# Altium PCB Miguel Board.PcbDoc
Units mil, origin at the board's own origin, x right, y up, seen from the top; angles counter-clockwise.
Board outline 6000 x 4000 mil, 2 copper layers (Top Layer, Bottom Layer); 71 components, 45 nets, 212 pads, 0 vias.
Unrouted connection lines stored in the file: 145.
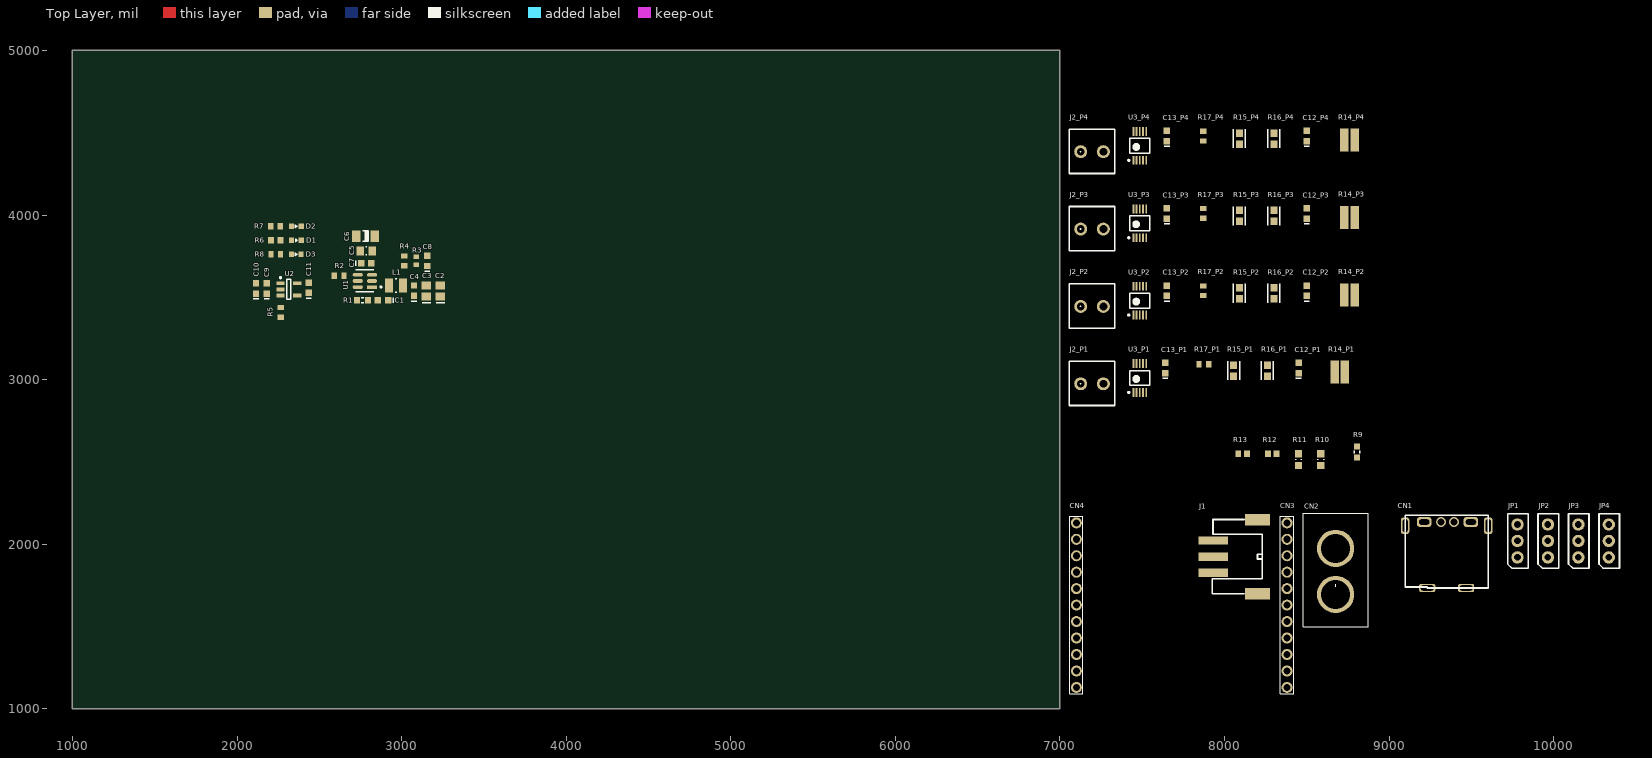
[diagram p0: Top Layer view]
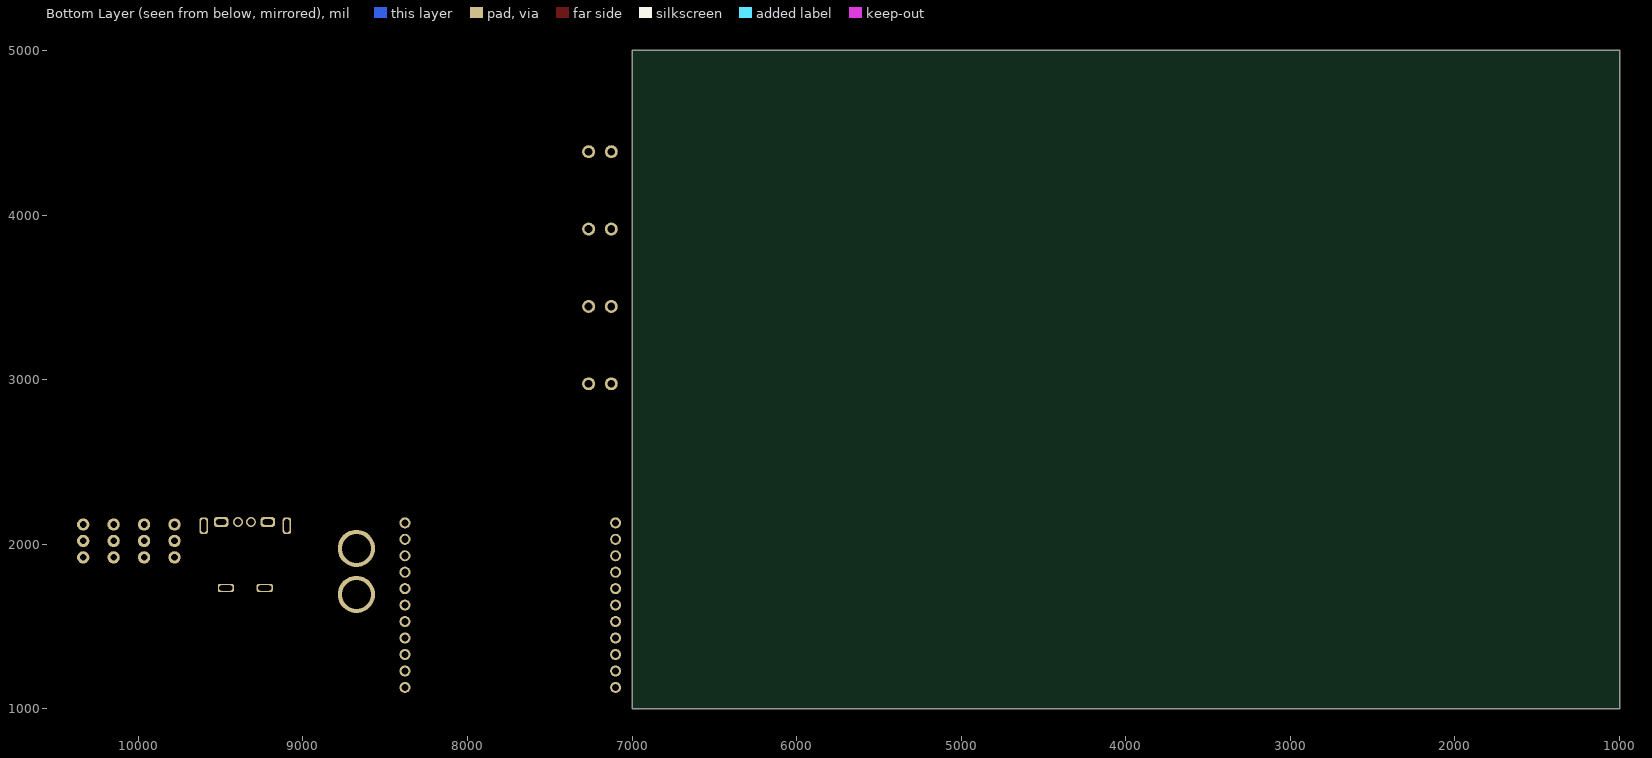
[diagram p1: Bottom Layer view, seen from below]

## Layer stack, top to bottom
Top Solder: solder mask 0.4, Solder Resist, Dk 3.5
Top Layer: signal copper 1.4
Dielectric 1: dielectric 12.6, FR-4, Dk 4.8
Bottom Layer: signal copper 1.4
Bottom Solder: solder mask 0.4, Solder Resist, Dk 3.5

## Board outline
1000,1000 7000,1000 7000,5000 1000,5000

## Design rules (kind name [scope] priority, off if disabled: settings)
Clearance [All] p1: gap=10 ignorepadtopadclearanceinfootprint=FALSE except(0: Arc-Hole Track-Hole SMDPad-Hole THPad-Hole Via-Hole Fill-Hole Poly-Hole Region-Hole Text-Hole)
PolygonConnect [All] p1: connectstyle=Relief reliefconductorwidth=10 reliefentries=4 polygonreliefangle="90 Angle" airgapwidth=10
RoomDefinition Power [InComponentClass('Power')] p1: confinementstyle=ConfineIn formatcopy=TRUE lockcomponents=FALSE outline 2060,3293.07 3345,3293.07 3345,4008.07 2060,4008.07
RoomDefinition P4 [InComponentClass('P4')] p2: confinementstyle=ConfineIn formatcopy=TRUE lockcomponents=FALSE outline 7045,4210 8855,4210 8855,4625 7045,4625
RoomDefinition P3 [InComponentClass('P3')] p3: confinementstyle=ConfineIn formatcopy=TRUE lockcomponents=FALSE outline 7045,3740 8855,3740 8855,4155 7045,4155
RoomDefinition P2 [InComponentClass('P2')] p4: confinementstyle=ConfineIn formatcopy=TRUE lockcomponents=FALSE outline 7045,3270 8855,3270 8855,3685 7045,3685
RoomDefinition P1 [InComponentClass('P1')] p5: confinementstyle=ConfineIn formatcopy=TRUE lockcomponents=FALSE outline 7045,2800 8785,2800 8785,3215 7045,3215
RoomDefinition External [InComponentClass('External')] p6: confinementstyle=ConfineIn formatcopy=TRUE lockcomponents=FALSE outline 7045,1065 10815,1065 10815,2745 7045,2745
RoutingVias [All] p1: holewidth=28 width=50 viastyle="Through Hole" minholewidth=28 minwidth=50 maxholewidth=28 maxwidth=50
SolderMaskExpansion [All] p1: expansion=4 istentingtop=FALSE
Width [All] p1: maxlimit=10 minlimit=10 preferedwidth=10
30 further rules are at their usual default settings.

## Classes and differential pairs
channel class "Current Sensors": P1 P2 P3 P4
net class Motor_Reset[1..4]: Motor_Reset1 Motor_Reset2 Motor_Reset3 Motor_Reset4
net class Motor_Alert[1..4]: Motor_Alert1 Motor_Alert2 Motor_Alert3 Motor_Alert4
net class Motor_ADC[1..4]: Motor_ADC1 Motor_ADC2 Motor_ADC3 Motor_ADC4
component class Power: C1 C2 C3 C4 C5 C6 C7 C8 C9 C10 C11 D1 D2 D3 L1 R1 R2 R3 R4 R5 R6 R7 R8 U1 U2
component class P4: C12_P4 C13_P4 J2_P4 R14_P4 R15_P4 R16_P4 R17_P4 U3_P4
component class P3: C12_P3 C13_P3 J2_P3 R14_P3 R15_P3 R16_P3 R17_P3 U3_P3
component class P2: C12_P2 C13_P2 J2_P2 R14_P2 R15_P2 R16_P2 R17_P2 U3_P2
component class P1: C12_P1 C13_P1 J2_P1 R14_P1 R15_P1 R16_P1 R17_P1 U3_P1
component class External: CN1 CN2 CN3 CN4 J1 JP1 JP2 JP3 JP4 R9 R10 R11 R12 R13

## Components (designator, comment, footprint, x,y, rotation, side; value= is the part's Value field where it differs from the comment)
C1 "0.1uF, 50V, 10%, X7R, 0603" "CAPC1608N(0603\")" 2886.5,3482.01 r180 top
C2 "22uF 35V 0805 SMD, Ceramic" "CAPC2012N(0805\")" 3235,3538.54 r90 top value=22µF
C3 "22uF 35V 0805 SMD, Ceramic" "CAPC2012N(0805\")" 3150,3538.54 r90 top value=22µF
C4 "Placeholder_Capacitor_0603" "CAPC1608N(0603\")" 3075,3540.51 r90 top value=DNP
C5 "10uF, 25V, X5R, 0805" CAPC2013X12N 2785,3782.01 r180 top
C6 "Placeholder_Capacitor_1206" "CAPC3216N(1206\")" 2780,3872.01 r0 top value=DNP
C7 "0.1uF, 50V, 10%, X7R, 0603" "CAPC1608N(0603\")" 2785,3707.01 r0 top
C8 "Placeholder_Capacitor_0603" "CAPC1608N(0603\")" 3155,3722.01 r90 top value=DNP
C9 "1uF 25V 0603 SMD, Ceramic" "CAPC1608N(0603\")" 2180,3553.5 r90 top value=1µF
C10 "0.1uF 16V 0603 SMD, Ceramic" "CAPC1608N(0603\")" 2115,3553.5 r90 top value=0.1µF
C11 "4.7uF 10V 0603 SMD, Ceramic" "CAPC1608N(0603\")" 2435,3558.5 r90 top value=4.7µF
C12_P1 "0.1uF, 50V, 10%, X7R, 0603" "CAPC1608N(0603\")" 8450,3070 r90 top (schematic designator C12)
C12_P2 "0.1uF, 50V, 10%, X7R, 0603" "CAPC1608N(0603\")" 8500,3540 r90 top (schematic designator C12)
C12_P3 "0.1uF, 50V, 10%, X7R, 0603" "CAPC1608N(0603\")" 8500,4010 r90 top (schematic designator C12)
C12_P4 "0.1uF, 50V, 10%, X7R, 0603" "CAPC1608N(0603\")" 8500,4480 r90 top (schematic designator C12)
C13_P1 "10 nF, 50V 0603 SMD, Ceramic" "CAPC1608N(0603\")" 7640,3070 r90 top value=10nF (schematic designator C13)
C13_P2 "10 nF, 50V 0603 SMD, Ceramic" "CAPC1608N(0603\")" 7650,3540 r90 top value=10nF (schematic designator C13)
C13_P3 "10 nF, 50V 0603 SMD, Ceramic" "CAPC1608N(0603\")" 7650,4010 r90 top value=10nF (schematic designator C13)
C13_P4 "10 nF, 50V 0603 SMD, Ceramic" "CAPC1608N(0603\")" 7650,4480 r90 top value=10nF (schematic designator C13)
CN1 "USB - Type A Female" "USB - Type A Female-Footprint-1" 9355,2135 r0 top
CN2 "XT-60, Male, 1x2, Through hole" "XT-60 Male" 8675,1695 r90 top
CN3 "PH1-11-UA" PH1-11-UA-Footprint-1 8380,1130 r90 top
CN4 "PH1-11-UA" PH1-11-UA-Footprint-1 7100,1130 r90 top
D1 "LT Q39G-Q1OO-25-1" FP-LB_Q39E-MFG 2360.47,3847.01 r180 top
D2 "LT Q39G-Q1OO-25-1" FP-LB_Q39E-MFG 2360,3932.01 r180 top
D3 "LT Q39G-Q1OO-25-1" FP-LB_Q39E-MFG 2359.53,3762.01 r180 top
J1 "S3B-XH-SM4-TB(LF)(SN)" "New footprint 1" 8200,1700 r90 top
J2_P1 "2x1 Terminal Block 3.5mm" "2x1 Terminal Block 3.5mm-Footprint-1" 7195,2975 r0 top (schematic designator J2)
J2_P2 "2x1 Terminal Block 3.5mm" "2x1 Terminal Block 3.5mm-Footprint-1" 7195,3445 r0 top (schematic designator J2)
J2_P3 "2x1 Terminal Block 3.5mm" "2x1 Terminal Block 3.5mm-Footprint-1" 7195,3915 r0 top (schematic designator J2)
J2_P4 "2x1 Terminal Block 3.5mm" "2x1 Terminal Block 3.5mm-Footprint-1" 7195,4385 r0 top (schematic designator J2)
JP1 "1x3 Male Jumper" "Header, Male, 1x3, Pitch: 0.1\" (2.54mm),THT" 9780,2020 r90 top
JP2 "1x3 Male Jumper" "Header, Male, 1x3, Pitch: 0.1\" (2.54mm),THT" 9965,2020 r90 top
JP3 "1x3 Male Jumper" "Header, Male, 1x3, Pitch: 0.1\" (2.54mm),THT" 10150,2020 r90 top
JP4 "1x3 Male Jumper" "Header, Male, 1x3, Pitch: 0.1\" (2.54mm),THT" 10335,2020 r90 top
L1 "DFE252012P-1R5M=P2" INDC2520X12N 2965,3572.01 r0 top
R1 "0R, 1%, 1/10W, 0603 SMD" "RESC1608N(0603\")" 2761.54,3482.01 r0 top value=0R
R2 "RC0603FR-0710KL" RESC1608X55X25ML10T15 2620.47,3632.01 r180 top
R3 "ERJ-3EKF7322V" RESC1608X55X30LL15T15 3090,3722.01 r270 top
R4 "RC0603FR-0710KL" RESC1608X55X25ML10T15 3015,3722.01 r270 top
R5 "RC0603FR-0710KL" RESC1608X55X25ML10T15 2265,3408.5 r90 top
R6 "ERJ3EKF1001V" RESC1608X55X30ML15T15 2235,3847.01 r0 top
R7 "536R" RESC1608X55X30ML15T15 2233.54,3932.01 r0 top
R8 "110R" RESC1608X55X25ML10T15 2235,3762.01 r0 top
R9 "0R, 1%, 1/10W, 0603 SMD" "RESC1608N(0603\")" 8805,2560 r90 top value=0R
R10 "RC0603FR-07160KL" RESC0603(1608)_M 8585,2514.57 r90 top
R11 "RMCF0603FT330K" RESC0603(1608)_M 8450,2514.57 r90 top
R12 "CRCW0603-100KFKEA" RESC1609X50X30ML10T20 8290,2549.57 r0 top
R13 "CRCW0603-100KFKEA" RESC1609X50X30ML10T20 8110,2549.57 r0 top
R14_P1 "3mR, 1%, 1W, 1206" RESC1632X07M 8700,3045 r0 top (schematic designator R14)
R14_P2 "3mR, 1%, 1W, 1206" RESC1632X07M 8760,3515 r0 top (schematic designator R14)
R14_P3 "3mR, 1%, 1W, 1206" RESC1632X07M 8760,3985 r0 top (schematic designator R14)
R14_P4 "3mR, 1%, 1W, 1206" RESC1632X07M 8760,4455 r0 top (schematic designator R14)
R15_P1 "ERJ3EKF10R0V" FP-ERJ3EK-IPC_A 8055,3055 r90 top (schematic designator R15)
R15_P2 "ERJ3EKF10R0V" FP-ERJ3EK-IPC_A 8090,3525 r90 top (schematic designator R15)
R15_P3 "ERJ3EKF10R0V" FP-ERJ3EK-IPC_A 8090,3995 r90 top (schematic designator R15)
R15_P4 "ERJ3EKF10R0V" FP-ERJ3EK-IPC_A 8090,4465 r90 top (schematic designator R15)
R16_P1 "ERJ3EKF10R0V" FP-ERJ3EK-IPC_A 8260,3055 r90 top (schematic designator R16)
R16_P2 "ERJ3EKF10R0V" FP-ERJ3EK-IPC_A 8300,3525 r90 top (schematic designator R16)
R16_P3 "ERJ3EKF10R0V" FP-ERJ3EK-IPC_A 8300,3995 r90 top (schematic designator R16)
R16_P4 "ERJ3EKF10R0V" FP-ERJ3EK-IPC_A 8300,4465 r90 top (schematic designator R16)
R17_P1 "RC0603FR-0710KL" RESC1608X55X25ML10T15 7875,3095 r0 top (schematic designator R17)
R17_P2 "RC0603FR-0710KL" RESC1608X55X25ML10T15 7870,3540 r90 top (schematic designator R17)
R17_P3 "RC0603FR-0710KL" RESC1608X55X25ML10T15 7870,4010 r90 top (schematic designator R17)
R17_P4 "RC0603FR-0710KL" RESC1608X55X25ML10T15 7870,4480 r90 top (schematic designator R17)
U1 "TPS563249DDCR" FP-DDC0005A-IPC_B 2776.68,3599.61 r180 top
U2 "LP2981-33DBVR" SOT95P280X145-5N 2315,3548.5 r0 top
U3_P1 "INA381A3IDGSR" TSSOP50P490X110-10N 7485,3010 r90 top (schematic designator U3)
U3_P2 "INA381A3IDGSR" TSSOP50P490X110-10N 7485,3480 r90 top (schematic designator U3)
U3_P3 "INA381A3IDGSR" TSSOP50P490X110-10N 7485,3950 r90 top (schematic designator U3)
U3_P4 "INA381A3IDGSR" TSSOP50P490X110-10N 7485,4420 r90 top (schematic designator U3)

## Footprints (in the part's own frame and the unit in brackets; to place one, negate y for a bottom-side part, rotate by r counter-clockwise, add the part's x,y. Pads: shape width x height; smd on the part's side, far side on the other; paste and mask are expansions set on the pad)
"2x1 Terminal Block 3.5mm-Footprint-1" [mm]
  round 2 hole 1.2: 1(-1.75,0) 2(1.75,0)
  silkscreen extent -3.5,-3.37 3.5,3.49, body extent -3.57,-4.32 4.08,4.08, height 13.05
"CAPC1608N(0603\")" [mm] "Chip Capacitor, Body 1.6x0.8mm (0603\"), IPC Medium Density"
  rect 1x1 smd: 1(-0.8,0) 2(0.8,0)
  silkscreen extent -1.6,-0.4 -1.6,0.4, body extent -0.8,-0.4 0.8,0.4, height 0.9
"CAPC2012N(0805\")" [mm] "Chip Capacitor, Body 2.0x1.3mm (0805\"), IPC Medium Density"
  rect 1.3x1.5 smd: 1(-0.85,0) 2(0.85,0)
  silkscreen extent -1.8,-0.65 -1.8,0.65, body extent -1,-0.62 1,0.63, height 1
CAPC2013X12N [mm] "Chip Capacitor, 2-Leads, Body 2.05x1.30mm, IPC Medium Density"
  rect 1.1x1.45 smd: 1(-0.925,0) 2(0.925,0)
  silkscreen extent -0.1,-0.63 0.1,0.63, body extent -1.07,-0.7 1.07,0.7, height 1.25
"CAPC3216N(1206\")" [mm] "Chip Capacitor, Body 3.2x1.6mm (1206\"), IPC Medium Density"
  rect 1.3x1.8 smd: 1(-1.45,0) 2(1.45,0)
  silkscreen extent -0.4,-0.8 0.4,0.8, body extent -1.6,-0.8 1.6,0.8, height 1
FP-DDC0005A-IPC_B [mm]
  rect 1.554x0.572 smd paste+0 mask+0: 1(-1.1,0.95)
  rrect100% 1.554x0.572 smd paste+0 mask+0: 2(-1.1,0) 3(-1.1,-0.95) 4(1.1,-0.95) 5(1.1,0) 6(1.1,0.95)
  silkscreen extent -2.6,-1.7 1.4,1.7, body extent -2.13,-1.7 2.13,1.7, height 0.25
FP-ERJ3EK-IPC_A [mil]
  rect 45.53x41.82 smd paste+0 mask+0: 1(-33.5,0) 2(33.5,0)
  silkscreen extent -56,-37 56,37, body extent -76,-41 76,41, height 10
FP-LB_Q39E-MFG [mm]
  rect 0.8x0.8 smd paste+0 mask+0: 1(-0.75,0) 2(0.75,0)
  silkscreen extent -0.13,-0.25 0.13,0.25, body extent -1.25,-0.55 1.25,0.55, height 0.25
"Header, Male, 1x3, Pitch: 0.1\" (2.54mm),THT" [mm]
  round 1.9 hole 1.016: 1(-2.54,0) 2(0,0) 3(2.54,0)
  silkscreen extent -4.19,-1.65 4.19,1.52, body extent -3.81,-1.27 3.81,1.27, height 9.5
INDC2520X12N [mm] "Chip Inductor, 2-Leads, Body 2.50x2.00mm, IPC Medium Density"
  rect 1.23x2.22 smd: 1(-1.085,0) 2(1.085,0)
  silkscreen extent -0.1,-1.01 0.1,1.01, body extent -1.35,-1.1 1.35,1.1, height 1.2
"New footprint 1" [mm]
  rect 1.3x4.5 smd: 1(3.2,6.817) 2(5.7,6.817) 3(8.199,6.817)
  rect 1.8x3.9 smd: 4(0,0) 5(11.4,0)
  silkscreen extent 0,-0.76 11.43,6.98, body extent -0.51,-1.7 11.94,8.3, height 6
PH1-11-UA-Footprint-1 [mil]
  round 67 hole 43.35: 1(0,0) 2(100,0) 3(200,0) 4(300,0) 5(400,0) 6(500,0) 7(600,0) 8(700,0) 9(800,0) 10(900,0) 11(1000,0)
  silkscreen extent -40,-40 1040,40, body extent -60,-49 1060,49, height 197
RESC0603(1608)_M [mm] "Chip Resistor, Body 1.6x0.8mm, IPC Low Density"
  rect 1.1x1.1 smd: 1(-0.9,0) 2(0.9,0)
  silkscreen extent -0.05,-0.45 0.05,0.45, body extent -0.85,-0.47 0.85,0.47, height 0.6
"RESC1608N(0603\")" [mm] "Chip Resistor, Body 1.6x0.8mm (0603\"), IPC Medium Density"
  rect 0.9x1 smd: 1(-0.85,0) 2(0.85,0)
  silkscreen extent -0.2,-0.4 0.2,0.4, body extent -0.77,-0.42 0.78,0.43, height 0.44
RESC1608X55X25ML10T15 [mm] "Chip Resistor, 2-Leads, Body 1.60x0.80mm, IPC Low Density"
  rect 0.8x1 smd: 1(-0.75,0) 2(0.75,0)
  body extent -0.85,-0.45 0.85,0.45, height 0.55
RESC1608X55X30LL15T15 [mm] "Chip Resistor, 2-Leads, Body 1.60x0.80mm, IPC High Density"
  rect 0.7x0.85 smd: 1(-0.625,0) 2(0.625,0)
  body extent -0.87,-0.48 0.87,0.48, height 0.55
RESC1608X55X30ML15T15 [mm] "Chip Resistor, 2-Leads, Body 1.60x0.80mm, IPC Low Density"
  rect 0.9x1.05 smd: 1(-0.725,0) 2(0.725,0)
  body extent -0.87,-0.48 0.87,0.48, height 0.55
RESC1609X50X30ML10T20 [mm] "Chip Resistor, 2-Leads, Body 1.55x0.85mm, IPC Low Density"
  rect 0.9x1.05 smd: 1(-0.675,0) 2(0.675,0)
  body extent -0.82,-0.48 0.82,0.48, height 0.5
RESC1632X07M [mm] "Chip Resistor, 2-Leads, Body 1.60x3.20mm, IPC Low Density"
  rect 1.3x3.55 smd: 1(-0.8,0) 2(0.8,0)
  body extent -0.9,-1.73 0.9,1.73, height 0.7
SOT95P280X145-5N [mm] "SOT23, 5-Leads, Body 2.90x2.80mm, Pitch 0.95mm, IPC Medium Density"
  rect 1.3x0.6 smd: 1(-1.3,0.95) 2(-1.3,0) 3(-1.3,-0.95) 4(1.3,-0.95) 5(1.3,0.95)
  silkscreen extent -1.42,-1.55 0.3,1.92, body extent -1.5,-1.53 1.5,1.53, height 1.45
TSSOP50P490X110-10N [mm] "TSSOP, 10-Leads, Body 3.00x3.00mm, Pitch 0.50mm, IPC Medium Density"
  rect 1.35x0.3 smd: 1(-2.225,1) 2(-2.225,0.5) 3(-2.225,0) 4(-2.225,-0.5) 5(-2.225,-1) 6(2.225,-1) 7(2.225,-0.5) 8(2.225,0) 9(2.225,0.5) 10(2.225,1)
  silkscreen extent -2.35,-1.55 1.15,1.82, body extent -2.45,-1.55 2.45,1.55, height 1.1
"USB - Type A Female-Footprint-1" [mil]
  rrect50% 86.6x59.06 hole 31.5 slot 63 at 0 deg: 1(-141.74,0) 4(141.74,0)
  round 60 hole 43.31: 2(-39.38,0) 3(39.38,0)
  rrect50% 51.18x98.43 hole 31.5 slot 78.74 at 90 deg: 5(247.76,-22.84) 8(-257.75,-22.84)
  rrect50% 98.43x51.18 hole 31.5 slot 78.74 at 0 deg: 6(113.11,-400.79) 7(-123.1,-400.79)
  silkscreen extent -258,-401 248,40, body extent -310,-512 310,57, height 290
"XT-60 Male" [mm]
  round 5.75 hole 4.5: 1(0,0) 2(7.1,0)
  silkscreen extent -5,-5 12.5,5, body extent -4.2,-4 11.7,4.15, height 16.5

## Part data
C1 C7 C12_P1 C12_P2 C12_P3 C12_P4: library part CMP-006-0007-1, "0.1µF ±10% Ceramic Capacitor X7R 0603 (1608 Metric)", Capacitance=0.1µF, Operating Temperature="-55°C ~ 125°C", Package / Case="0603 (1608 Metric)", Component Type=Standard, ComponentLink1Description=Digi-Key, ComponentLink1URL=https://www.digikey.ca/product-detail/en/tdk-corporation/C1608X7R1H104M080AA/445-5098-1-ND/2093713, Created By="Poorna Chander Kalidas", Design Item ID="0.1uF, 50V, 10%, X7R, 0603", Mounting Type="Surface Mount, MLCC", Pin Count=2, Source=AUVic_Schematic_Library_Capacitors.SchLib
C2 C3: library part CMP-006-0036-1, "Capacitor, Ceramic, 35V, +/- 20%, 0805 SMD, X5R", Component Type=Standard, Design Item ID="22uF 35V 0805 SMD, Ceramic", PackageDescription="Chip Capacitor", Pin Count=2, Published=14-06-01, Publisher=AUVic, Source=AUVic_Schematic_Library_Capacitors.SchLib
C4 C8: library part CMP-006-0054-1, "Placeholder 0603 SMT Footprint", Component Type="Standard (No BOM)", Date Created=2016-06-26, Design Item ID=Placeholder_Capacitor_0603, Made By="Ashwin Sira", PackageDescription="Chip Capacitor", Pin Count=2, Publisher=AUVic, Source=AUVic_Schematic_Library_Capacitors.SchLib
C5: library part CMP-00114-1, "0805 10 uF 25 V ±10% Tolerance X5R SMT Multilayer Ceramic Capacitor", Capacitance=10uF, Case Code (Imperial)=0805, Case Code (Metric)=2012, Dielectric=X7R, Max Operating Temperature=85°C, Min Operating Temperature=-55°C, Package Quantity=1, Resistor Type=Ceramic, Tolerance=10%, Voltage Rating=25V, Case/Package=0805, Height=1.25mm, Lead Free="Lead Free", Length=0.079inch, Mount="Surface Mount", Number of Pins=2, Packaging="Tape and Reel", REACH SVHC="No SVHC", Termination=SMD/SMT, Thickness=0.053inch, Voltage Rating (DC)=25V, Width=0.049inch
C6: library part CMP-006-0056-1, "Placeholder 1206 SMT Footprint", Component Type="Standard (No BOM)", Date Created=2016-06-26, Design Item ID=Placeholder_Capacitor_1206, Made By="Ashwin Sira", PackageDescription="Chip Capacitor", Pin Count=2, Publisher=AUVic, Source=AUVic_Schematic_Library_Capacitors.SchLib
C9: library part CMP-006-0027-1, "Capacitor, Ceramic, 25V, +/- 10%, 0603 SMD, X5R", Component Type=Standard, Created By="Andy Bates", Design Item ID="1uF 25V 0603 SMD, Ceramic", MFG=Murata-Electronics-North-America, MFG#=GRM188R61E105KA12D, PackageDescription="Chip Capacitor", Pin Count=2, Published=16-06-27, Publisher=AUVic, Source=AUVic_Schematic_Library_Capacitors.SchLib
C10: library part CMP-006-0005-1, "Capacitor, Ceramic, 16V, +/- 10%, 0603 SMD, X7R", Component Type=Standard, Created By="Andy Bates", Design Item ID="0.1uF 16V 0603 SMD, Ceramic", PackageDescription="Chip Capacitor", Pin Count=2, Published=16-04-26, Publisher=AUVic, Source=AUVic_Schematic_Library_Capacitors.SchLib
C11: library part CMP-006-0043-1, "Capacitor, Ceramic, 10V, +/- 10%, 0603 SMD, X5R", Component Type=Standard, Created By="Ashwin Sira", Design Item ID="4.7uF 10V 0603 SMD, Ceramic", MFG=Samsung, MFG#=GRM188R61A475KE15D, PackageDescription="Chip Capacitor", Pin Count=2, Published=16-06-23, Publisher=AUVic, Source=AUVic_Schematic_Library_Capacitors.SchLib
C13_P1 C13_P2 C13_P3 C13_P4: library part CMP-006-0010-1, "Capacitor, Ceramic, 50V, +/- 10%, 0603 SMD", Component Type=Standard, Created By=Gabriel, Design Item ID="10 nF, 50V 0603 SMD, Ceramic", MFG=Samsung, MFG#=GRM188R61A475KE15D, PackageDescription="Chip Capacitor", Pin Count=2, Published=16-06-23, Publisher=AUVic, Source=AUVic_Schematic_Library_Capacitors.SchLib
CN1: library part CMP-00116-2, "USB - Type A Female USB 2.0 THT", LCSC Part #=C168725, Created By="Miguel Manguerra"
CN2: library part CMP-005-0041-1, Component Type="Standard (No BOM)", Date Published=2016-09-08, Design Item ID="XT-60, Male, 1x2, Through hole", Pin Count=2, Publisher="Andy Bates", Source=AUVic_Schematic_Library_Connectors.SchLib
CN3 CN4: library part CMP-00135-1, "Connector Header Through Hole 11 position 0.100\" (2.54mm)"
D1 D2 D3: library part CMP-00064-3, "LED GREEN DIFFUSED 0603 SMD", Case/Package=SMD/SMT, Color=Green, Forward Current=15mA, Forward Voltage=2.85V, Max Operating Temperature=85°C, Min Operating Temperature=-40°C, Reverse Voltage=5V, Test Current=5mA, Depth=0.9mm, Dominant Wavelength=530nm, Length=1.7mm, Lens Style=Diffused,Colorless,Rectangular, Luminous Flux=0.55lm, Luminous Intensity=280mcd, Mount="Surface Mount", Number of Elements=1, Number of LEDs=1, Number of Pins=2, Packaging="Tape and Reel", Radiation Hardening=No
J1: library part CMP-00132-1, "JST (JAPAN SOLDERLESS TERMINALS) - S3B-XH-SM4-TB(LF)(SN) - Wire-To-Board Connector, XH Series, Surface Mount, Header, 3, 2.5 mm, Tin Plated Contacts RoHS Compliant: Yes", Color=Natural, Contact Resistance=20mR, Housing Color=Beige, Max Current Rating=3A, Max Operating Temperature=85°C, Max Voltage Rating (AC)=250V, Min Operating Temperature=-25°C, Package Quantity=1, Connector Type="Male Pin", Contact Material="Copper Alloy,Brass", Contact Plating=Tin,Copper, Contact Type="Male Pin", Depth=10mm, Fastening Type=Detent, Gender=Male, Housing Material=Polyamide, Lead Free="Lead Free", Length=12.5mm, Mount="Surface Mount", Number of Contacts=3, Number of Positions=3, Number of Rows=1, Orientation="Right Angle", Packaging="Tape and Reel", Pitch=2.5mm, REACH SVHC="No SVHC", Series=XH, Termination=Solder
J2_P1 J2_P2 J2_P3 J2_P4: library part CMP-00117-2, "P=3.5mm Screw terminal RoHS", LCSC Part #=C474892, Created By="Miguel Manguerra"
JP1 JP2 JP3 JP4: library part CMP-004-0002-1, Component Type=Standard, Design Item ID="1x3 Male Jumper", Made By="Poorna Chander Kalidas", Pin Count=3, Source=AUVic_Schematic_Library_Connectors.SchLib
L1: library part CMP-00112-1, "Ind Metal Alloy Shielded 1.5uH 20% 1MHz Powdered Iron 2.6A 1008 T/R", Case Code (Imperial)=1008, Case Code (Metric)=2520, Current Rating=3.5A, DC Resistance (DCR)=60mR, Inductance=1.5uH, Max DC Current=2.6A, Max Operating Temperature=125°C, Min Operating Temperature=-40°C, Resistor Type="Wirewound,Metal Alloy", Test Frequency=1MHz, Tolerance=20%, Case/Package=1008, Core Material=Ferrite, Depth=2mm, Height - Seated (Max)=0.039inch, Length=0.098inch, Mount="Surface Mount", Packaging="Tape and Reel", Shielding=Shielded, Width=0.079inch
R1 R9: library part CMP-047-0001-1, Component Type=Standard, Created On=14-05-31, Design Item ID="0R, 1%, 1/10W, 0603 SMD", Last Edited=14-05-31, Made By="Ashwin Sira", Owned By=AUVic, Pin Count=2, Source=AUVic_Schematic_Library_Resistors.SchLib
R2 R4 R5 R17_P1 R17_P2 R17_P3 R17_P4: library part CMP-00037-1, "Res General Purpose Thick Film 0603 10K Ohm 1% 1/10W ±100ppm/°C Molded SMD Paper T/R", Case Code (Imperial)=0603, Case Code (Metric)=1608, Max Operating Temperature=155°C, Min Operating Temperature=-55°C, Power Rating=100mW, Resistance=10kR, Temperature Coefficient=100ppm/°C, Tolerance=1%, Voltage Rating=75V, Voltage Rating (DC)=50V, Case/Package=0603, Composition="Thick Film", Depth=0.8mm, Height=0.45mm, Lead Free="Lead Free", Lead Pitch=0.3mm, Length=1.6mm, Military Standard=Not, Number of Pins=2, Packaging="Tape and Reel", REACH SVHC="No SVHC", Termination=SMD/SMT, Weight=7.1E-05oz, Width=0.8mm
R3: library part CMP-00029-1, "Res Thick Film 0603 73.2K Ohm 1% 0.1W(1/10W) ±100ppm/C Pad SMD Automotive T/R", Case Code (Imperial)=0603, Case Code (Metric)=1608, Max Operating Temperature=155°C, Max Power Dissipation=100mW, Min Operating Temperature=-55°C, Package Quantity=1, Resistance=73.2kR, Temperature Coefficient=100ppm/°C, Tolerance=1%, Voltage Rating=75V, Voltage Rating (DC)=50V, Case/Package=0603, Composition="Thick Film", Contact Plating=Tin, Depth=0.8mm, Features="Automotive AEC-Q200", Height=0.022inch, Lead Free="Lead Free", Length=1.6mm, Military Standard=Not, Mount="Surface Mount", Number of Terminations=2, Packaging="Tape and Reel", Power Rating=100mW, Radiation Hardening=No, REACH SVHC="No SVHC", Termination=SMD/SMT, Width=0.031inch
R6: library part CMP-00062-2, "Res Thick Film 0603 1K Ohm 1% 1/10W ±100ppm/°C Molded SMD Punched Carrier T/R", Case Code (Imperial)=0603, Case Code (Metric)=1608, Max Operating Temperature=155°C, Max Power Dissipation=100mW, Min Operating Temperature=-55°C, Package Quantity=5000, Resistance=1kR, Temperature Coefficient=100ppm/°C, Tolerance=1%, Voltage Rating=75V, Case/Package=0603, Composition="Thick Film", Contact Plating=Tin, Depth=0.8mm, Features="Automotive AEC-Q200", Height=0.45mm, Lead Free="Lead Free", Length=1.6mm, Military Standard=Not, Mount="Surface Mount", Number of Pins=2, Number of Terminations=2, Packaging="Tape and Reel", Power Rating=100mW, Radiation Hardening=No, REACH SVHC="No SVHC", Termination=SMD/SMT, Voltage Rating (DC)=75V, Width=0.8mm
R7: library part CMP-00071-2, "SMD Chip Resistor, 0603 [1608 Metric], 536 ohm, ERJ3EK Series, 75 V, Thick Film, 100 mW", Case Code (Imperial)=0603, Case Code (Metric)=1608, Max Operating Temperature=155°C, Max Power Dissipation=100mW, Min Operating Temperature=-55°C, Package Quantity=1, Temperature Coefficient=100ppm/°C, Tolerance=1%, Voltage Rating=75V, Voltage Rating (DC)=50V, Case/Package=0603, Composition="Thick Film", Contact Plating=Tin, Depth=0.8mm, Features="Automotive AEC-Q200", Height=0.022inch, Lead Free="Lead Free", Length=1.6mm, Military Standard=Not, Mount="Surface Mount", Number of Terminations=2, Packaging="Tape and Reel", Power Rating=100mW, REACH SVHC="No SVHC", Resistance=536R, Termination=SMD/SMT, Width=0.8mm
R8: library part CMP-00069-2, "RES SMD 110 OHM 1% 1/10W 0603", Case Code (Imperial)=0603, Case Code (Metric)=1608, Max Operating Temperature=155°C, Max Power Dissipation=100mW, Min Operating Temperature=-55°C, Package Quantity=1, Temperature Coefficient=100ppm/°C, Tolerance=1%, Voltage Rating=50V, Working Voltage=75V, Case/Package=0603, Composition="Thick Film", Depth=0.8mm, Features="Moisture Resistant", Height=0.022inch, Lead Free="Lead Free", Length=1.6mm, Military Standard=Not, Number of Terminations=2, Packaging="Tape and Reel", Power Rating=100mW, Resistance=110R, Termination=SMD/SMT, Voltage Rating (DC)=50V, Width=0.031inch
R10: library part CMP-00134-1, "RES SMD 160K OHM 1% 1/10W 0603", Case Code (Imperial)=0603, Case Code (Metric)=1608, Max Operating Temperature=155°C, Max Power Dissipation=100mW, Min Operating Temperature=-55°C, Package Quantity=1, Resistance=160kR, Resistor Type="Thick Film", Temperature Coefficient=100ppm/°C, Tolerance=1%, Voltage Rating=50V, Case/Package=0603, Construction=Rectangular, Depth=0.8mm, Features="Moisture Resistant", Height=0.022inch, Lead Free="Lead Free", Length=0.063inch, Military Standard=Not, Mount="Surface Mount", Number of Terminations=2, Packaging="Tape and Reel", Power Rating=100mW, RoHS Compliant=Yes, Series=RC, Size Code=0603, Technology="THICK FILM", Termination=SMD/SMT, Voltage Rating (DC)=50V, Width=0.031inch
R11: library part CMP-00133-1, "RES 330K OHM 1% 1/10W 0603", Case Code (Imperial)=0603, Case Code (Metric)=1608, Max Operating Temperature=155°C, Max Power Dissipation=100mW, Min Operating Temperature=-55°C, Resistance=330kR, Resistor Type="Thick Film", Temperature Coefficient=100ppm/°C, Tolerance=1%, Case/Package=0603, Contact Plating=Tin,Matte, Features="Automotive AEC-Q200", Height=0.022inch, Length=0.061inch, Mount="Surface Mount", Number of Terminations=2, Packaging="Tape and Reel", Radiation Hardening=No, RoHS Compliant=Yes, Series=RMCF, Width=0.031inch
R12 R13: library part CMP-00036-2, "Resistor; Thick Film; 100 Kilohms; 0.1 W; 1%; SMT; 0603; TCR 37 ppm/DegC; Tape and Reel", Case Code (Imperial)=0603, Case Code (Metric)=1608, Max Operating Temperature=155°C, Max Power Dissipation=100mW, Min Operating Temperature=-55°C, Package Quantity=10, Resistance=100kR, Temperature Coefficient=100ppm/°C, Tolerance=1%, Voltage Rating=75V, Case/Package=0603, Composition="Thick Film", Contact Plating=Tin,Lead, Depth=0.85mm, Features="Automotive AEC-Q200", Height=0.45mm, Lead Free="Lead Free", Length=1.55mm, Military Standard=Not, Number of Pins=2, Number of Terminations=2, Packaging="Tape and Reel", Power Rating=100mW, Radiation Hardening=No, REACH SVHC=Unknown, Termination=SMD/SMT, Voltage Rating (DC)=75V, Weight=7.1E-05oz, Width=0.033inch
R14_P1 R14_P2 R14_P3 R14_P4: library part CMP-00122-4, "3 mOhms ±1% 1W Chip Resistor Wide 1206 (3216 Metric), 0612", Resistance=3mR
R15_P1 R15_P2 R15_P3 R15_P4 R16_P1 R16_P2 R16_P3 R16_P4: library part CMP-00034-2, "PANASONIC - ERJ3EKF10R0V - SMD Chip Resistor, 0603 [1608 Metric], 10 ohm, ERJ3EK Series, 75 V, Thick Film, 100 mW", Case Code (Imperial)=0603, Case Code (Metric)=1608, Max Operating Temperature=155°C, Max Power Dissipation=100mW, Min Operating Temperature=-55°C, Package Quantity=5000, Resistance=10R, Temperature Coefficient=100ppm/°C, Tolerance=1%, Voltage Rating=75V, Case/Package=0603, Composition="Thick Film", Contact Plating=Tin, Depth=0.8mm, Features="Automotive AEC-Q200", Height=0.45mm, Lead Free="Lead Free", Length=1.6mm, Military Standard=Not, Mount="Surface Mount", Number of Pins=2, Number of Terminations=2, Packaging="Tape and Reel", Power Rating=100mW, Radiation Hardening=No, REACH SVHC="No SVHC", Termination=SMD/SMT, Voltage Rating (DC)=75V, Width=0.8mm, Working Voltage=75V
U1: library part CMP-044-0004-1, "17-V, 3-A, constant 1.4-MHz synchronous step-down voltage regulator 6-SOT-23-THIN -40 to 125"
U2: library part CMP-044-0003-2, "IC REG LINEAR 3.3V 100MA SOT23-5", Case/Package=SOT-23, Dropout Voltage=200mV, Input Bias Current=600uA, Max Input Voltage=16V, Max Operating Temperature=125°C, Max Output Current=100mA, Min Input Voltage=2.2V, Min Operating Temperature=-40°C, Nominal Output Voltage=3.3V, Output Voltage Accuracy=2%, Package Quantity=1, Accuracy=2%, Contact Plating=Tin,Matte, Lead Free="Lead Free", Mount="Surface Mount", Number of Outputs=1, Number of Pins=5, Number of Regulators=1, Output Current=100mA, Output Type=Fixed, Output Voltage=3.3V, Packaging="Tape and Reel", Polarity=Positive, Quiescent Current=600uA, Radiation Hardening=No, REACH SVHC="No SVHC"
U3_P1 U3_P2 U3_P3 U3_P4: library part CMP-00120-1, "26V, 350kHz current sense amplifier w/ integrated over-current comparator 10-VSSOP -40 to 125"

## Nets (pads, with @x,y where several pads share a name; then routed paths per layer and width w, separated by ;. In a path a pad name is that pad's centre, name@x,y a point inside that pad or via, vN(x,y) a via of type N, cw(c..) or ccw(c..) an arc to the next point about the centre after c; other vN are vias at no path point)
3V3: C11.2 CN4.2 R8.1 R17_P1.2 R17_P2.2 R17_P3.2 R17_P4.2 U2.5 U3_P1.2 U3_P1.7 U3_P2.2 U3_P2.7 U3_P3.2 U3_P3.7 U3_P4.2 U3_P4.7
5V: C2.2 C3.2 C4.2 C8.1 C9.2 C10.2 CN1.1 CN4.1 JP1.2 JP2.2 JP3.2 JP4.2 L1.2 R3.2 R4.2 R7.1 U2.1
Cell_ADC_1: R11.1 R13.2
Cell_ADC_2: R10.2 R12.2
GND: C2.1 C3.1 C4.1 C5.2 C6.1 C7.1 C9.1 C10.1 C11.1 C13_P1.1 C13_P2.1 C13_P3.1 C13_P4.1 CN1.4 CN1.5 CN1.6 CN1.7 CN1.8 CN2.1 CN3.1 D1.1 D2.1 D3.1 J1.1 J1.4 J1.5 J2_P1.2 J2_P2.2 J2_P3.2 J2_P4.2 JP1.3 JP2.3 JP3.3 JP4.3 R4.1 R12.1 R13.1 U1.1 U2.2 U3_P1.5 U3_P2.5 U3_P3.5 U3_P4.5
MOTOR: C12_P1.1 C12_P2.1 C12_P3.1 C12_P4.1 J2_P1.1 J2_P2.1 J2_P3.1 J2_P4.1 R14_P1.2 R14_P2.2 R14_P3.2 R14_P4.2 R16_P1.2 R16_P2.2 R16_P3.2 R16_P4.2
Motor_ADC1: C13_P1.2 U3_P1.8 U3_P1.9
Motor_ADC2: C13_P2.2 U3_P2.8 U3_P2.9
Motor_ADC3: C13_P3.2 U3_P3.8 U3_P3.9
Motor_ADC4: C13_P4.2 U3_P4.8 U3_P4.9
Motor_Alert1: R17_P1.1 U3_P1.3
Motor_Alert2: R17_P2.1 U3_P2.3
Motor_Alert3: R17_P3.1 U3_P3.3
Motor_Alert4: R17_P4.1 U3_P4.3
Motor_PWM_1: JP1.1
Motor_PWM_2: JP2.1
Motor_PWM_3: JP3.1
Motor_PWM_4: JP4.1
Motor_Reset1: U3_P1.4
Motor_Reset2: U3_P2.4
Motor_Reset3: U3_P3.4
Motor_Reset4: U3_P4.4
NetC1_1: C1.1 L1.1 U1.2
NetC1_2: C1.2 R1.2
NetC8_2: C8.2 R3.1 U1.4
NetCN1_2: CN1.2 R9.1
NetCN1_3: CN1.3 R9.2
NetCN4_3: CN4.3 R2.2
NetCN4_4: CN4.4 R5.1 R5.2 U2.3
NetD1_2: D1.2 R6.2
NetD2_2: D2.2 R7.2
NetD3_2: D3.2 R8.2
NetJ1_2: J1.2 R11.2
NetJ1_3: J1.3 R10.1
NetR1_1: R1.1 U1.6
NetR2_1: R2.1 U1.5
NetR15_P1_1: R15_P1.1 U3_P1.1
NetR15_P2_1: R15_P2.1 U3_P2.1
NetR15_P3_1: R15_P3.1 U3_P3.1
NetR15_P4_1: R15_P4.1 U3_P4.1
NetR16_P1_1: R16_P1.1 U3_P1.10
NetR16_P2_1: R16_P2.1 U3_P2.10
NetR16_P3_1: R16_P3.1 U3_P3.10
NetR16_P4_1: R16_P4.1 U3_P4.10
VBATT: C5.1 C6.2 C7.2 C12_P1.2 C12_P2.2 C12_P3.2 C12_P4.2 CN2.2 R6.1 R14_P1.1 R14_P2.1 R14_P3.1 R14_P4.1 R15_P1.2 R15_P2.2 R15_P3.2 R15_P4.2 U1.3
pads on no net: CN3.2 CN3.3 CN3.4 CN3.5 CN3.6 CN3.7 CN3.8 CN3.9 CN3.10 CN3.11 CN4.5 CN4.6 CN4.7 CN4.8 CN4.9 CN4.10 CN4.11 U2.4 U3_P1.6 U3_P2.6 U3_P3.6 U3_P4.6